# Altium PCB LED_Controller_4Channels.PcbDoc
Units mil, origin at the board's own origin, x right, y up, seen from the top; angles counter-clockwise.
Board outline 639.94 x 178.26 mil, 2 copper layers (Top Layer, Bottom Layer); 19 components, 17 nets, 52 pads, 7 vias.
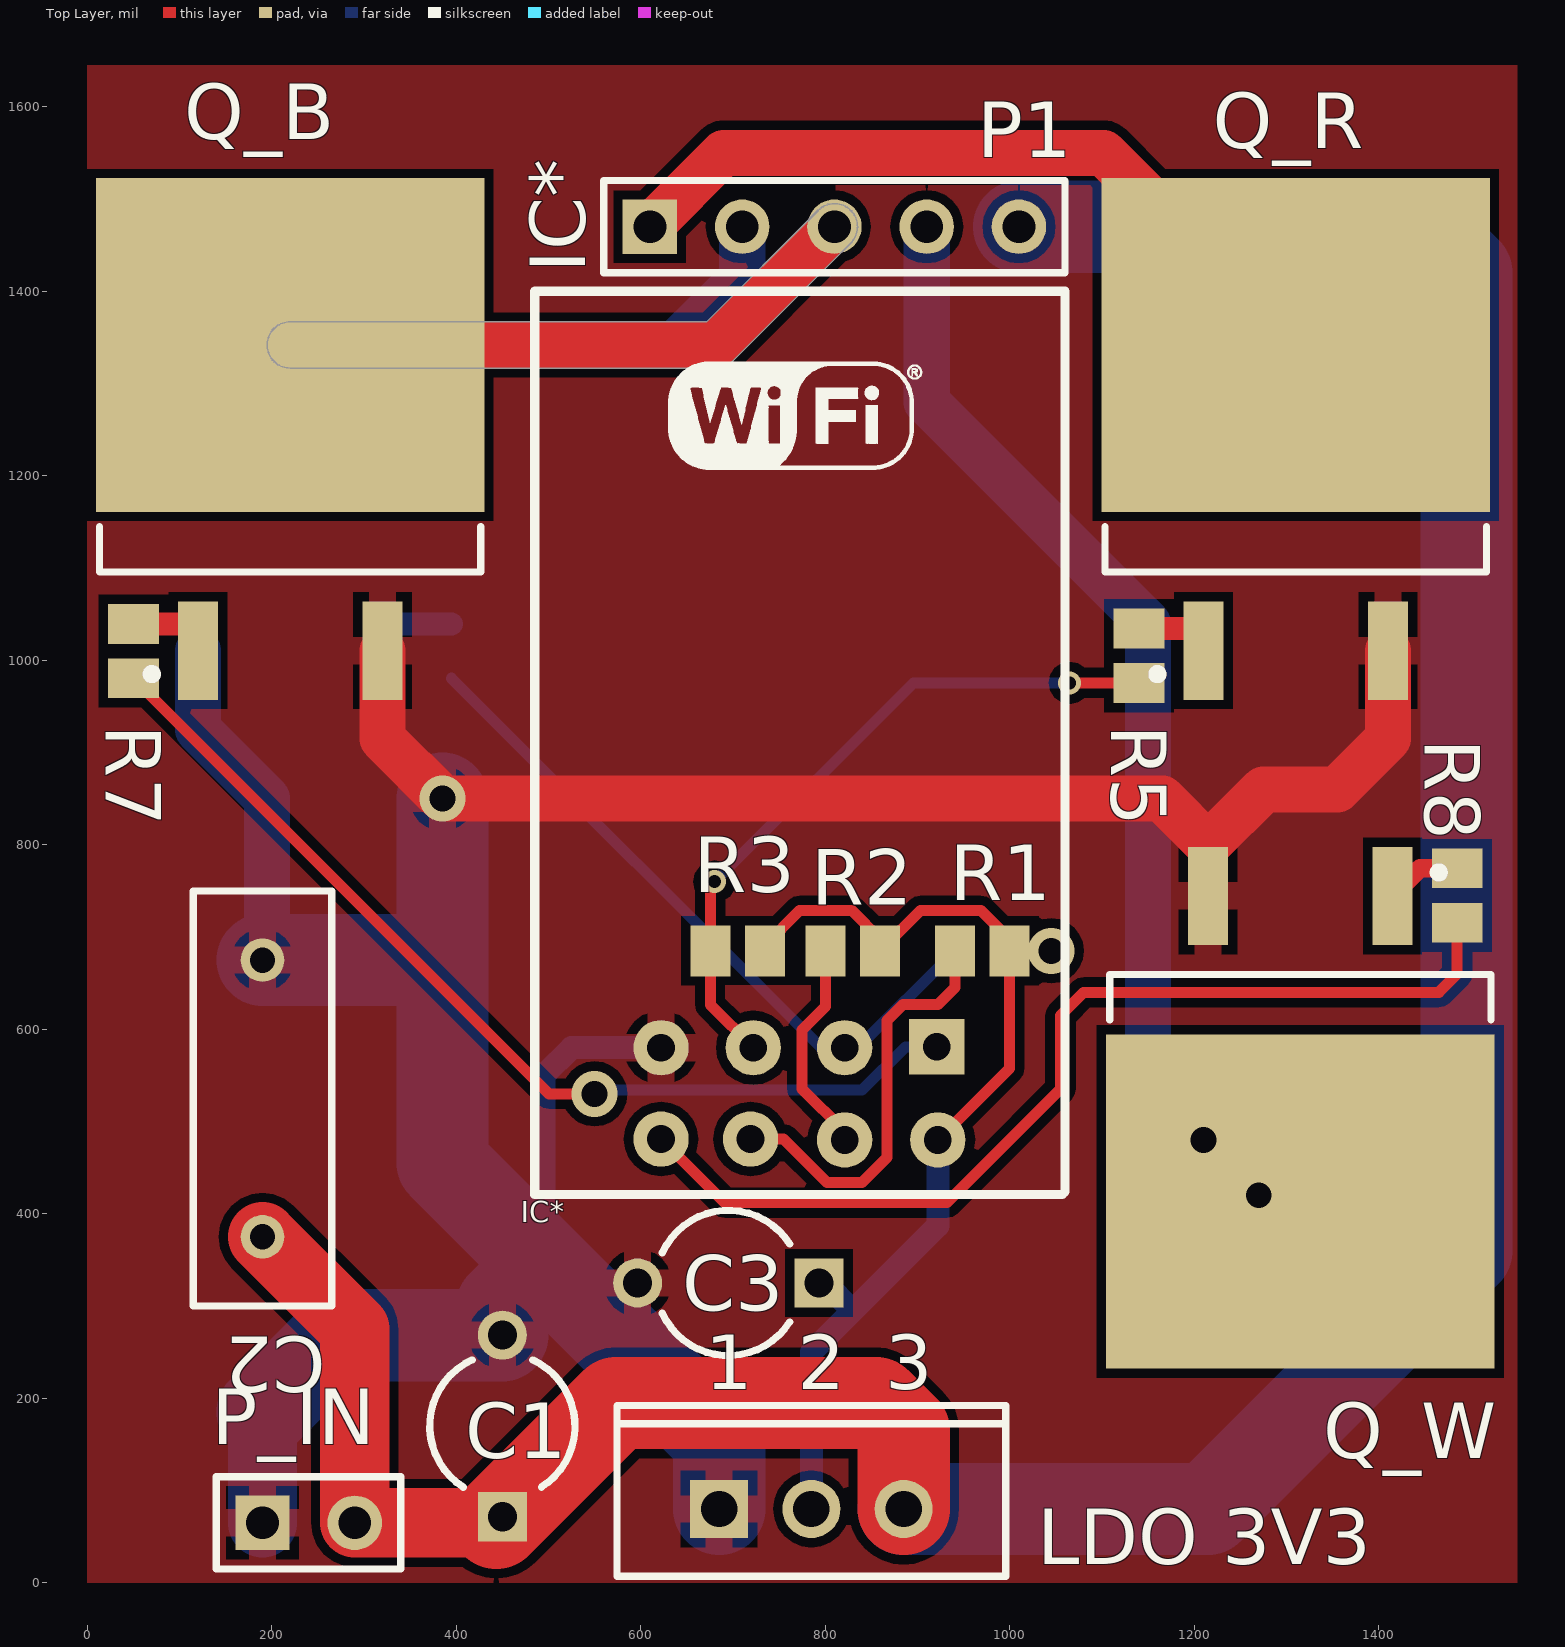
[diagram p0: Top Layer view]
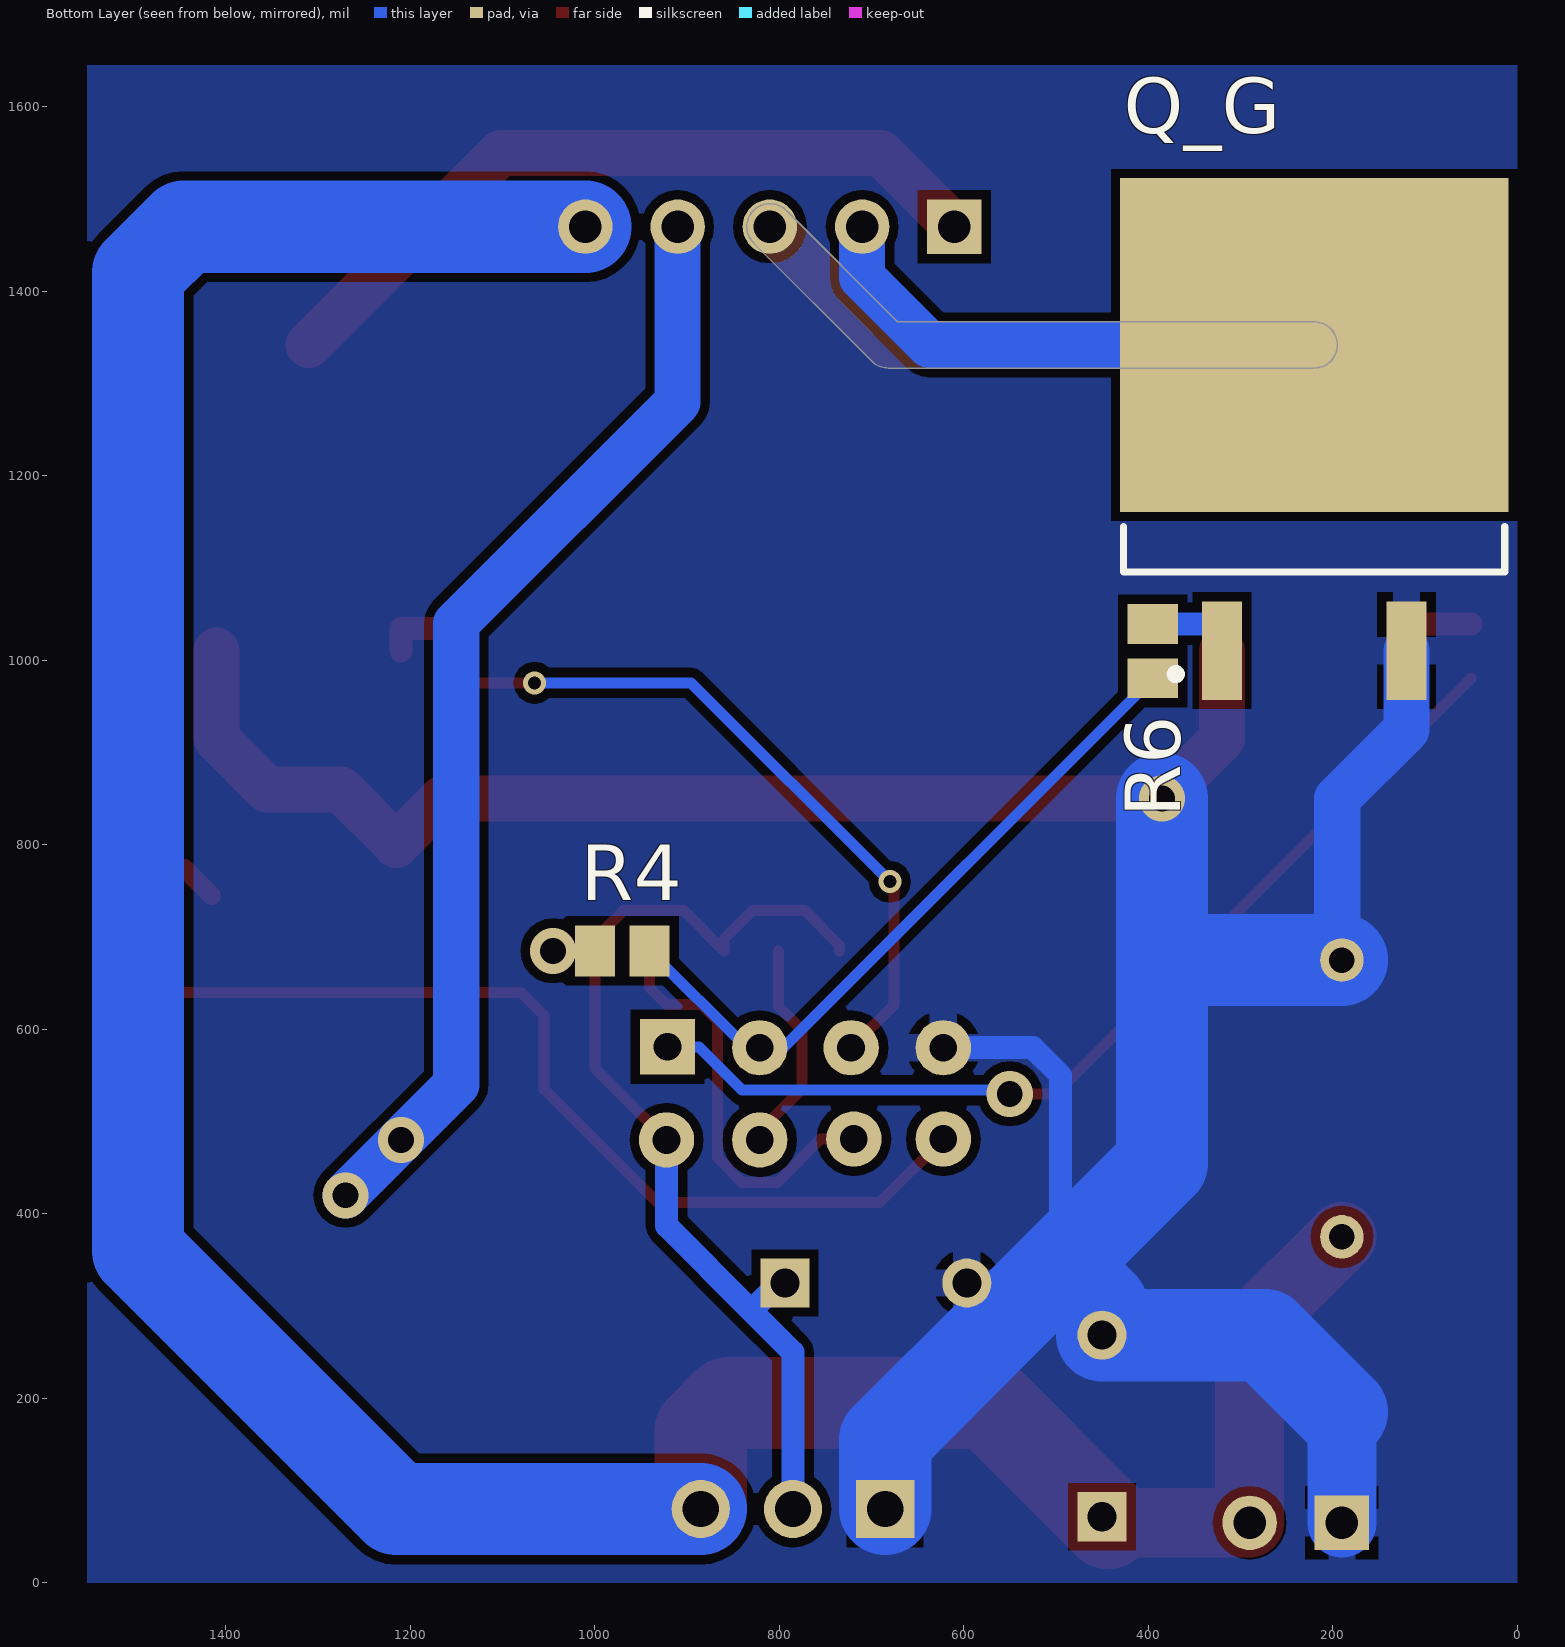
[diagram p1: Bottom Layer view, seen from below]

## Layer stack, top to bottom
Top Solder: solder mask 0.4, Solder Resist, Dk 3.5
Top Layer: signal copper 1.4
Dielectric 1: dielectric 12.6, FR-4, Dk 4.8
Bottom Layer: signal copper 1.4
Bottom Solder: solder mask 0.4, Solder Resist, Dk 3.5

## Board outline
220,1316.72 cw(c220,1341.73) 220,1366.75 671.37,1366.75 792.31,1487.69 cw(c810,1470) 835.02,1470 cw(c810,1470) 827.69,1452.31 699.42,1324.04 cw(c681.73,1341.73) 681.73,1316.72

## Design rules (kind name [scope] priority, off if disabled: settings)
Clearance [All] p1: gap=10
PolygonConnect [All] p1: connectstyle=Relief reliefconductorwidth=30 reliefentries=4 polygonreliefangle="90 Angle" airgapwidth=10
RoutingVias [All] p1: holewidth=28 width=50 viastyle="Through Hole" minholewidth=28 minwidth=50 maxholewidth=28 maxwidth=50
SolderMaskExpansion [All] p1: expansion=4
Width [All] p1: maxlimit=1000 minlimit=10 preferedwidth=10 minimp=50.000000 maximp=50.000000 favimp=50.000000
29 further rules are at their usual default settings.

## Components (designator, comment, footprint, x,y, rotation, side; value= is the part's Value field where it differs from the comment)
C1 "Cap2" CAPR5-4X5 450,170 r90 top
C2 "Cap" RAD-0.3 190,525 r270 top
C3 "Cap2" CAPR5-4X5 695,325 r180 top
IC* "ESP8266 ESP-01" "ESP8266 ESP-01" 485,420 r0 top
"LDO 3V3" "LM317KC" KC03 785,80 r0 top
P1 "Header 5" HDR1X5 610,1470 r0 top
P_IN "Header 2" HDR1X2 190,65 r0 top
Q_B "IRLU024N" D-Pack 220,1200 r90 top
Q_G "IRLU024N" D-Pack 220,1200 r90 bottom
Q_R "IRLU024N" D-Pack 1310,1200 r90 top
Q_W "IRLU024N" D-Pack 1315,555 r270 top
R1 "Res" 0805 970,685 r180 top
R2 "Res" 0805 830,685 r180 top
R3 "Res" 0805 705,685 r0 top
R4 "Res" 0805 970,685 r0 bottom
R5 "Res" 0805 1140,1005 r270 top
R6 "Res" 0805 395,1010 r270 bottom
R7 "Res" 0805 50,1010 r270 top
R8 "Res" 0805 1485,745 r270 top

## Footprints (in the part's own frame and the unit in brackets; to place one, negate y for a bottom-side part, rotate by r counter-clockwise, add the part's x,y. Pads: shape width x height; smd on the part's side, far side on the other; paste and mask are expansions set on the pad)
0805 [mm] "Chip Capacitor, Body 2.0x1.3mm, IPC High Density"
  rect 1.1x1.4 smd: 1(-0.75,0) 2(0.75,0)
  body extent -1.1,-0.72 1.1,0.72, height 1.4
CAPR5-4X5 [mm] "Capacitor; 2 Leads"
  rect 1.35x1.35 hole 0.8: 1(-2.5,0)
  round 1.35 hole 0.8: 2(2.5,0)
  silkscreen extent -1.69,-2 1.82,2
D-Pack [mm] "D2-PAK, 4-Leads, Body 6.5x7.2mm, Pitch 2.54mm, Lead Span 15.1mm, IPC Low Density"
  rect 2.7x1.1 smd: 1(-4.818,2.54) 3(-4.818,-2.54)
  rect 9.2x10.7 smd: 2(3.6,0)
  silkscreen extent -5.59,-5.25 -1.4,5.25, body extent -2.65,-5.28 6.35,5.28, height 4.69
"ESP8266 ESP-01" [mil] "ESP8266 ESP-01"
  rect 60x60 hole 30: 1(436,161)
  round 60 hole 30: 2(437,60) 3(336,160) 4(336,60) 5(237,160) 6(234,61) 7(137,160) 8(137,61)
  silkscreen extent 0,1 575,980, body extent 1,2 572,978, height 231
HDR1X2 [mm] "Connector; Header; 2 Position"
  rect 1.5x1.5 hole 0.9: 1(0,0)
  round 1.5 hole 0.9: 2(2.54,0)
  silkscreen extent -1.27,-1.27 3.81,1.27
HDR1X5 [mm] "Connector; Header; 5 Position"
  rect 1.5x1.5 hole 0.9: 1(0,0)
  round 1.5 hole 0.9: 2(2.54,0) 3(5.08,0) 4(7.62,0) 5(10.16,0)
  silkscreen extent -1.27,-1.27 11.43,1.27
KC03 [mm] "TO, Thru-Hole, Vertical, Heatsink Mounted; 3 In-Line Leads; Pitch 2.54 mm"
  rect 1.6x1.6 hole 1: 1(-2.54,0)
  round 1.6 hole 1: 2(0,0) 3(2.54,0)
  silkscreen extent -5.35,-1.85 5.35,2.85
RAD-0.3 [mm] "Radial Cap, Thru-Hole; 2 Leads; 0.3 in Pin Spacing"
  round 1.2 hole 0.7: 1(-3.81,0) 2(3.81,0)
  silkscreen extent -5.71,-1.91 5.71,1.91

## Part data
C1 C2 C3: "Capacitor"
"LDO 3V3": "3-Terminal Adjustable Regulator"
P1: "Header, 5-Pin"
P_IN: "Header, 2-Pin"
Q_B Q_G Q_R Q_W: "HEXFET Power MOSFET"
R1 R2 R3 R4 R5 R6 R7 R8: "Resistor"

## Via types
v1: diameter 50, hole 28, Top Layer to Bottom Layer, 5 vias
v2: diameter 25, hole 14, Top Layer to Bottom Layer, 2 vias

## Nets (pads, with @x,y where several pads share a name; then routed paths per layer and width w, separated by ;. In a path a pad name is that pad's centre, name@x,y a point inside that pad or via, vN(x,y) a via of type N, cw(c..) or ccw(c..) an arc to the next point about the centre after c; other vN are vias at no path point)
GND: "LDO 3V3.1" C1.2 C2.1 C3.2 IC*.7 P_IN.1 Q_B.3 Q_G.3 Q_R.3 Q_W.3 | length 3745.9
  Top Layer w50: Q_B.3 320,915 v1(385,850) 1165,850 1215,800 1275,860 1355,860 1410,915 Q_R.3
  Bottom Layer w25: 495,345 495,550 525,580 IC*.7 ; 560,280 596.57,316.57 C3.2
  Bottom Layer w50: Q_G.3 120,925 195,850 C2.1@195,675
  Bottom Layer w75: P_IN.1 190,185
  Bottom Layer w100: 190,185 273.43,268.43 C1.2 450,300 495,345 ; C2.1 195,675 385,675 ; v1(385,850) 385,675 ; 685,80 685,155 560,280 495,345 ; 385,675 385,455 495,345
NetIC*_1: IC*.1 R7.2 | length 1078.7
  Top Layer w12: R7.2 500.47,530 v1(550,530)
  Bottom Layer w12: v1(550,530) 554,534 840.05,534 887.05,581 IC*.1
NetIC*_3: IC*.3 R4.1 R6.2 | length 754.8
  Bottom Layer w12: R6.2 795.47,580 IC*.3 835.47,580 R4.1
NetIC*_4: IC*.4 R2.2 | length 234.6
  Top Layer w12: R2.2 800.47,624.53 775,599.05 775,535.47 821,489.47 IC*.4
NetIC*_5: IC*.5 R3.1 R5.2 | length 748.5
  Top Layer w12: v2@675.47,760 R3.1 675.47,626.53 IC*.5 ; v2(1065,975.47) R5.2
  Bottom Layer w12: v2(680,760) 895.47,975.47 v2(1065,975.47)
NetIC*_6: IC*.6 R1.2 | length 455.2
  Top Layer w12: IC*.6 754.95,481 801.95,434 840.05,434 867,460.95 867,609.63 884.37,627 922,627 940.47,645.47 R1.2
NetIC*_8: IC*.8 R8.2 | length 1096.6
  Top Layer w12: IC*.8 691,412 932,412 1055,535 1055,615 1080,640 1465,640 1485,660 R8.2
NetP1_1: P1.1 Q_R.2 | length 819.4
  Top Layer w50: P1.1 690,1550 1101.73,1550 Q_R.2
NetP1_2: P1.2 Q_G.2 | length 575.3
  Bottom Layer w50: Q_G.2 636.73,1341.73 710,1415 P1.2
NetP1_3: P1.3 Q_B.2 | length 643.1
  Top Layer w50: Q_B.2 681.73,1341.73 P1.3
NetP1_4: P1.4 Q_W.2 | length 1199.1
  Bottom Layer w50: P1.4 910,1280 1150,1040 1150,540 v1(1270,420)
  other v1: 1210,480
NetQ_B_1: Q_B.1 R7.1 | length 99.2
  Top Layer w20: Q_B.1 Q_B.1@120,1039.53
  Top Layer w25: R7.1 Q_B.1@120,1039.53
NetQ_G_1: Q_G.1 R6.1 | length 104.2
  Bottom Layer w25: Q_G.1 320,1039.53 R6.1
NetQ_R_1: Q_R.1 R5.1 | length 94.2
  Top Layer w25: R5.1 1210,1034.53 Q_R.1
NetQ_W_1: Q_W.1 R8.1 | length 82.4
  Top Layer w20: Q_W.1 1444.84,774.53 R8.1
VCC_3.3: "LDO 3V3.2" C3.1 IC*.2 R1.1 R2.1 R3.2 R4.2 | length 1197.4
  Top Layer w12: R3.2 734.53,690.9 772.19,728.56 828.75,728.56 859.53,697.78 R2.1 903.09,728.56 968.75,728.56 999.53,697.78 R1.1 ; IC*.2@922,488 IC*.2 999.53,557.53 R1.1 ; v1(1045,685) R1.1
  Bottom Layer w12: R4.2 v1(1045,685)
  Bottom Layer w25: 785,80 785,250 830,295 ; C3.1 800,325 830,295 ; IC*.2 922,387 830,295
VCC_12: "LDO 3V3.3" C1.1 C2.2 P1.5 P_IN.2 | length 3389.4
  Top Layer w75: C2.2 290,275 P_IN.2 C1.1@443.43,65
  Top Layer w100: C1.1@443.43,65 C1.1 573.43,195 855,195 885,165 885,80
  Bottom Layer w100: 885,80 1215,80 1495,360 1495,1420 1445,1470 P1.5

## Polygon pours and split planes (outlines as drawn)
GND on Bottom Layer "Bottom Layer-No Net" (solid, pour order 4): 0,1645 1550,1645 1550,0 0,0
GND on Top Layer "Bottom Layer-No Net" (solid, pour order 6): 0,1645 1550,1645 1550,0 0,0

## Silkscreen, mask and mechanical layers (free items; w line width, h text height)
Mechanical 13:
  lines w10: 0,1645 1550,1645 1550,0 0,0 0,1645 ; 0,1645 0,1645

## Text inside footprints (layer, text, board x,y; h text height)
IC*: Mechanical 13 "CUTOUT POLYGON" at 495.04,1358.59 h10; Mechanical 13 "ANTENNA AREA" at 495.04,1378.59 h10
"LDO 3V3": Top Overlay "2" at 770,210 h59.06; Top Overlay "1" at 670,210 h59.06; Top Overlay "3" at 865,210 h59.06